# Altium PCB BAR_SENS.PcbDoc
Units mm, origin at the board's own origin, x right, y up, seen from the top; angles counter-clockwise.
Board outline 25.1 x 8 mm, 2 copper layers (Top Layer, Bottom Layer), stack 1.071 mm thick; 9 components, 7 nets, 28 pads, 2 vias.
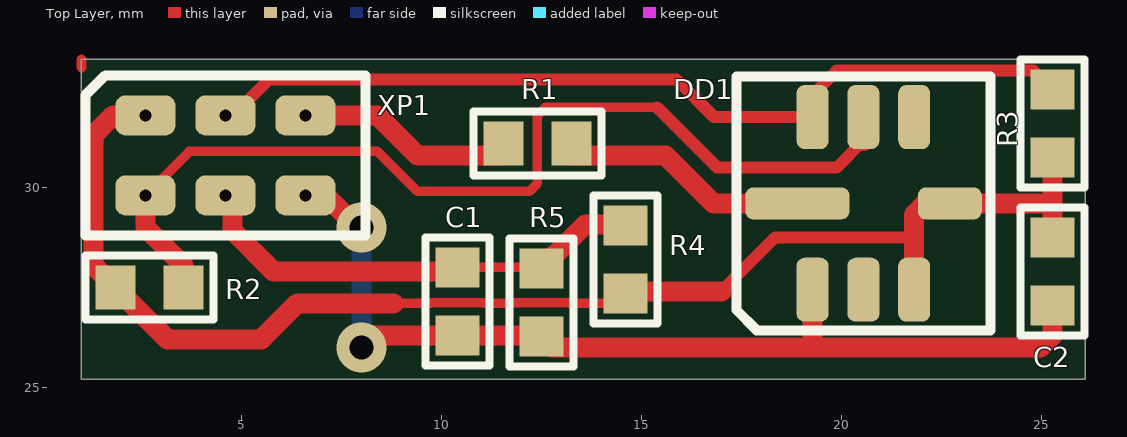
[diagram p0: Top Layer view]
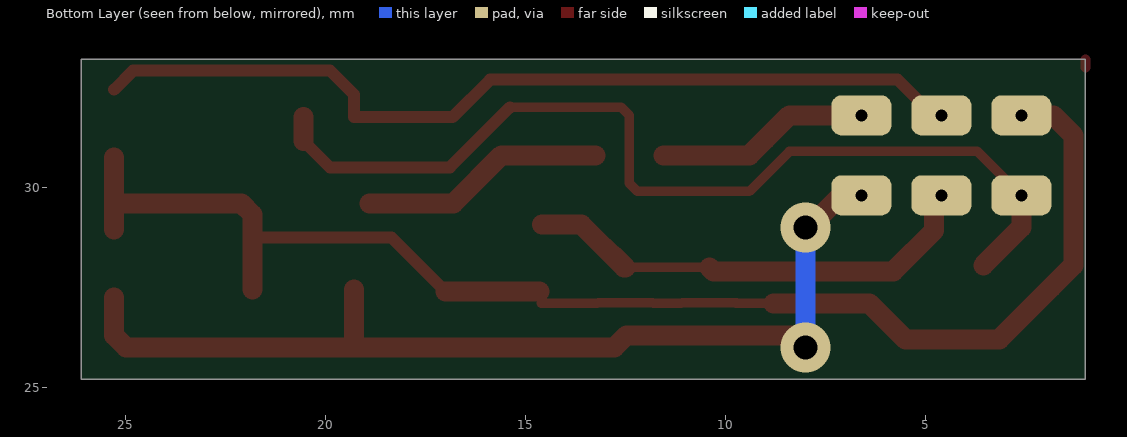
[diagram p1: Bottom Layer view, seen from below]

## Layer stack, top to bottom
Top Solder: solder mask 0.0102, Solder Resist, Dk 3.5
Top Layer: signal copper 0.0356
Dielectric1: core 1, FR-4, Dk 4.8
Bottom Layer: signal copper 0.0356
Bottom Solder: solder mask 0.0102, Solder Resist, Dk 3.5

## Board outline
1,25.2 1,33 1,33.2 26.1,33.2 26.1,25.2

## Design rules (kind name [scope] priority, off if disabled: settings)
Clearance [All] p1: gap=0.2
HoleSize HoleSize_1 [All] p1: absolutevalues=TRUE maxlimit=4 minlimit=0.025 maxpercent=80.000 minpercent=20.000
HoleSize [All] p2: absolutevalues=TRUE maxlimit=2.54 minlimit=0.025 maxpercent=80.000 minpercent=20.000
MinimumSolderMaskSliver MinimumSolderMaskSliver_1 [All] p1: minsoldermaskwidth=0
MinimumSolderMaskSliver [All] p2: minsoldermaskwidth=0
PolygonConnect PolygonConnect_isVia [isVia] p1: connectstyle=Direct reliefconductorwidth=0.254 reliefentries=4 polygonreliefangle="90 Angle" airgapwidth=0.254
PolygonConnect [All] p2: connectstyle=Relief reliefconductorwidth=0.254 reliefentries=4 polygonreliefangle="90 Angle" airgapwidth=0.254
RoomDefinition BAR_SENS [InComponentClass('BAR_SENS')] p1: confinementstyle=ConfineIn formatcopy=TRUE lockcomponents=FALSE outline -5,24.3 28.4,24.3 28.4,35.3 -5,35.3
RoutingVias [All] p1: holewidth=0.711 width=1.27 viastyle="Through Hole" minholewidth=0.2 minwidth=0.6 maxholewidth=0.711 maxwidth=1.27
SilkToSilkClearance SilkToSilkClearance_1 [All] p1: silktosilkclearance=0
SilkToSilkClearance [All] p2: silktosilkclearance=0
SilkToSolderMaskClearance [IsPad] p1: minsilkscreentomaskgap=0 clearancetoexposedcopper=TRUE
SolderMaskExpansion [All] p1: expansion=0.1
Width Width_1 [All] p1: maxlimit=5 minlimit=0.1 preferedwidth=0.3 minimp=50.000000 maximp=50.000000 favimp=50.000000
Width [All] p2: maxlimit=5 minlimit=0.254 preferedwidth=0.254
25 further rules are at their usual default settings.

## Components (designator, comment, footprint, x,y, rotation, side; value= is the part's Value field where it differs from the comment)
C1 "0,01uF" Cap_0805 10.4,27.15 r270 top
C2 "0.47uF" Cap_0805 25.281,27.895 r90 top
DD1 "BMP085" BMP085 19.281,27.695 r90 top
R1 "4.7k" Res_0805 12.4,31.1 r180 top
R2 "10k" Res_0805 2.7,27.5 r0 top
R3 "10k" Res_0805 25.281,31.595 r90 top
R4 "1M" Res_0805 14.6,28.2 r270 top
R5 "1M" Res_0805 12.5,27.12 r90 top
XP1 "BAR_SENS" SENS_LEGS 2.6,31.3 r0 top

## Footprints (in the part's own frame and the unit in brackets; to place one, negate y for a bottom-side part, rotate by r counter-clockwise, add the part's x,y. Pads: shape width x height; smd on the part's side, far side on the other; paste and mask are expansions set on the pad)
BMP085 [mm] "3"
  rrect50% 1.6x0.8 smd: 1(-0.254,0) 2(-0.254,-1.27) 3(-0.254,-2.54) 5(4.064,-2.54) 6(4.064,-1.27) 7(4.064,0)
  rrect50% 0.8x1.6 smd: 4(1.905,-3.429)
  rrect50% 0.8x2.6 smd: 8(1.905,0.381)
  silkscreen extent -1.27,-4.44 5.08,1.91
Cap_0805 [mm]
  rect 1x1.1 smd: 1(-0.85,0) 2(0.85,0)
  silkscreen extent -1.6,-0.8 1.6,0.8
Res_0805 [mm]
  rect 1x1.1 smd: 1(-0.85,0) 2(0.85,0)
  silkscreen extent -1.6,-0.8 1.6,0.8
SENS_LEGS [mm]
  rrect50% 1.5x1 hole 0.3: 1(0,0.5) 2(0,-1.5) 3(2,0.5) 4(2,-1.5) 5(4,0.5) 6(4,-1.5)
  silkscreen extent -1.5,-2.5 5.5,1.5

## Part data
C1 C2: library part Cap_0805
R1 R2 R3 R4 R5: library part Res_0805

## Via types
v1: diameter 1.25, hole 0.6, Top Layer to Bottom Layer, 2 vias

## Nets (pads, with @x,y where several pads share a name; then routed paths per layer and width w, separated by ;. In a path a pad name is that pad's centre, name@x,y a point inside that pad or via, vN(x,y) a via of type N, cw(c..) or ccw(c..) an arc to the next point about the centre after c; other vN are vias at no path point)
GND: C1.2 C2.1 DD1.1 R5.1 XP1.6 | length 24.2
  Top Layer w0.5: XP1.6@7.1,29.8 7.9,29 v1(8,29) ; v1(8,26) 8.3,26.3 C1.2 R5.1@12.47,26.3 ; R5.1 12.77,26 19.281,26 ; DD1.1 19.281,25.995 24.981,25.995 25.281,26.295 C2.1 C2.1@25.281,27.245
  Bottom Layer w0.5: v1(8,26) v1(8,29)
NetC1_1: C1.1 R4.1 R5.2 XP1.4 | length 12.3
  Top Layer w0.24: XP1.4@4.78,29.536 XP1.4@5.044,29.8 ; C1.1 12.5,28 R5.2@12.53,28 ; R5.2 R5.2@12.53,28 ; R5.2@12.7,28 R5.2@12.53,28
  Top Layer w0.5: XP1.4@4.78,29.536 4.78,28.92 5.8,27.9 6.29,27.9 10.3,27.9 C1.1 ; R5.2@12.5,28 R5.2@12.8,28.3 ; R5.2@12.53,28 13.6,29.07 R4.1@14.58,29.07
NetDD1_6: DD1.6 R2.2 XP1.2 | length 24.3
  Top Layer w0.24: XP1.2 3.7,30.9 8.4,30.9 9.4,29.9 12.2,29.9 12.4,30.1 12.4,31.8 12.6,32 15.39,32
  Top Layer w0.3: 15.39,32 16.89,30.5 19.876,30.5 ; 19.881,30.495 DD1.6@20.551,31.165
  Top Layer w0.5: XP1.2 2.6,29 R2.2@3.55,28.05 ; DD1.6@20.551,31.165 DD1.6
NetDD1_7: DD1.7 R3.2 XP1.3 | length 22.4
  Top Layer w0.3: XP1.3 4.8,31.8 5.7,32.7 15.876,32.7 ; 15.881,32.695 16.817,31.759 DD1.7 19.281,32.318 19.881,32.918 24.808,32.918 R3.2
NetR1_2: R1.2 XP1.5 | length 5.4
  Top Layer w0.5: XP1.5 8.4,31.8 9,31.2 9.4,30.8 R1.2@11.55,30.8
VCC: C2.2 DD1.3 DD1.4 R2.1 R3.1 R4.2 XP1.1 | length 36.2
  Top Layer w0.24: 8.8,27.1 9.737,27.1 9.717,27.12 11.083,27.12 11.103,27.1 11.797,27.1 11.817,27.12 13.183,27.12 13.203,27.1 R4.2@14.6,27.1
  Top Layer w0.3: 17,27.4 18.35,28.75 21.821,28.75
  Top Layer w0.5: XP1.1 1.8,31.8 1.3,31.3 1.3,28.05 R2.1 3.15,26.2 5.5,26.2 6.4,27.1 8.8,27.1 ; R4.2@14.65,27.4 17,27.4 ; 21.821,28.75 DD1.3 21.821,29.321 22.1,29.6 DD1.4 25.281,29.6 25.281,28.945 R3.1
XCLR: DD1.8 R1.1 | length 6.1
  Top Layer w0.5: R1.1@13.25,30.8 15.6,30.8 16.795,29.605 ; 16.8,29.6 DD1.8
pads on no net: DD1.2 DD1.5
copper on no net: | length 0.2
  Top Layer w0.254: 1,33 1,33.2

## Silkscreen, mask and mechanical layers (free items; w line width, h text height)
Mechanical 1:
  lines w0.254: 1,33 1,25.2 26.1,25.2 26.1,33.2 1,33.2